# EAGLE board calculator (EAGLE 9.7.0)

Size 197.85 x 123.23 mm. Coordinates in mm from the lower left corner, seen from the top.
Outline: 0,0 197.85,0 197.85,123.23 0,123.23 0,0
Copper layers (1*16): Top 0.035mm / dielectric 1.5mm / Bottom 0.035mm
Design rules "default": minimum track width 6mil, minimum drill 0.35mm, track to track 6mil, track to pad 6mil, pad to pad 6mil, via to via 6mil, smd to smd 6mil, copper to edge 40mil, drill to drill 6mil, minimum pad ring 10mil, minimum via ring 8mil, stop-mask expansion 4mil, vias tented up to drill 0mil, thermal gap 10mil

## Footprints (pad centres in the part's own frame; a part is rotated, then mirrored left to right if it is on the bottom)
RESAD1016W63L850D250B = drill 0.83 pad 1.43: 1 -5.08,0; 2 5.08,0
SWITCH-MOMENTARY-PTH-6.5MM = drill 1.016 pad 1.88: 1 -3.251,2.261; 2 3.251,2.261; 3 -3.251,-2.261; 4 3.251,-2.261
ARDUINO-UNO-R3-SHIELD = drill 1.016 pad 1.88: 3.3V 24.13,-2.54; 5V 24.13,0; A0 24.13,12.7; A1 24.13,15.24; A2 24.13,17.78; A3 24.13,20.32; A4 24.13,22.86; A5 24.13,25.4; AREF -24.13,-13.97; D2 -24.13,20.32; D3 -24.13,17.78; D4 -24.13,15.24; D5 -24.13,12.7; D6 -24.13,10.16; D7 -24.13,7.62; D8 -24.13,3.81; D9 -24.13,1.27; D10 -24.13,-1.27; D11 -24.13,-3.81; D12 -24.13,-6.35; D13 -24.13,-8.89; GND@0 24.13,2.54; GND@1 24.13,5.08; GND@2 -24.13,-11.43; IOREF 24.13,-7.62; NC 24.13,-10.16; RES 24.13,-5.08; RX -24.13,25.4; SCL -24.13,-19.05; SDA -24.13,-16.51; TX -24.13,22.86; VIN 24.13,7.62
JHD-162A = drill 1.016 long: 1 -19.05,0; 2 -16.51,0; 3 -13.97,0; 4 -11.43,0; 5 -8.89,0; 6 -6.35,0; 7 -3.81,0; 8 -1.27,0; 9 1.27,0; 10 3.81,0; 11 6.35,0; 12 8.89,0; 13 11.43,0; 14 13.97,0; 15 16.51,0; 16 19.05,0

## Placement (x,y rotation side)
R1  220  [RESAD1016W63L850D250B]  161.27,47.07 90 top
R2  220  [RESAD1016W63L850D250B]  110.47,11.51 90 top
R3  220  [RESAD1016W63L850D250B]  64.75,21.67 0 top
R4  220  [RESAD1016W63L850D250B]  77.45,21.67 0 top
R5  220  [RESAD1016W63L850D250B]  90.15,21.67 0 top
R7  220  [RESAD1016W63L850D250B]  102.85,21.67 0 top
R8  220  [RESAD1016W63L850D250B]  113.01,11.51 90 top
R9  220  [RESAD1016W63L850D250B]  107.93,47.07 90 top
R10  220  [RESAD1016W63L850D250B]  95.23,41.99 0 top
R11  220  [RESAD1016W63L850D250B]  82.53,39.45 0 top
R12  220  [RESAD1016W63L850D250B]  69.83,41.99 0 top
R13  220  [RESAD1016W63L850D250B]  57.13,39.45 180 top
R14  220  [RESAD1016W63L850D250B]  49.51,47.07 90 top
R15  220  [RESAD1016W63L850D250B]  41.89,44.53 90 top
R16  220  [RESAD1016W63L850D250B]  34.27,8.97 90 top
R17  220  [RESAD1016W63L850D250B]  36.81,47.07 90 top
R19  220  [RESAD1016W63L850D250B]  16.49,39.45 180 top
R20  220  [RESAD1016W63L850D250B]  6.33,26.75 90 top
R24  220  [RESAD1016W63L850D250B]  26.65,24.21 180 top
R26  220  [RESAD1016W63L850D250B]  36.81,8.97 90 top
R27  220  [RESAD1016W63L850D250B]  62.21,8.97 90 top
S1  SWITCH_MOMENTARY  [SWITCH-MOMENTARY-PTH-6.5MM]  107.42,35.35 330 top
S2  SWITCH_MOMENTARY  [SWITCH-MOMENTARY-PTH-6.5MM]  94.72,35.35 330 top
S3  SWITCH_MOMENTARY  [SWITCH-MOMENTARY-PTH-6.5MM]  82.02,35.35 330 top
S4  SWITCH_MOMENTARY  [SWITCH-MOMENTARY-PTH-6.5MM]  69.32,35.35 330 top
S5  SWITCH_MOMENTARY  [SWITCH-MOMENTARY-PTH-6.5MM]  56.62,35.35 330 top
S6  SWITCH_MOMENTARY  [SWITCH-MOMENTARY-PTH-6.5MM]  105.9,19.42 30 top
S7  SWITCH_MOMENTARY  [SWITCH-MOMENTARY-PTH-6.5MM]  93.2,19.42 30 top
S8  SWITCH_MOMENTARY  [SWITCH-MOMENTARY-PTH-6.5MM]  80.5,19.42 30 top
S9  SWITCH_MOMENTARY  [SWITCH-MOMENTARY-PTH-6.5MM]  67.8,19.42 30 top
S10  SWITCH_MOMENTARY  [SWITCH-MOMENTARY-PTH-6.5MM]  55.1,19.42 30 top
S11  SWITCH_MOMENTARY  [SWITCH-MOMENTARY-PTH-6.5MM]  44.43,28.02 90 top
S12  SWITCH_MOMENTARY  [SWITCH-MOMENTARY-PTH-6.5MM]  28.68,35.35 330 top
S13  SWITCH_MOMENTARY  [SWITCH-MOMENTARY-PTH-6.5MM]  15.98,35.35 330 top
S14  SWITCH_MOMENTARY  [SWITCH-MOMENTARY-PTH-6.5MM]  27.16,19.42 30 top
S15  SWITCH_MOMENTARY  [SWITCH-MOMENTARY-PTH-6.5MM]  14.46,19.42 30 top
U1  ARDUINO-UNO-R3-SHIELD  [ARDUINO-UNO-R3-SHIELD]  79.83,93.38 270 top
U3  LCD-16X2JHD-162A  [JHD-162A]  142.22,37.04 0 top

## Library data of the parts
R1-R5 R7-R17 R19 R20 R24 R26 R27 S1-S15 U1 U3 = Tinkercad

## Nets
S1_4: R9.1 R10.2 S1.3 S1.4
S2_3: R10.1 R11.2 S2.3 S2.4
S3_3: R11.1 R12.2 S3.3 S3.4
S4_4: R12.1 R13.1 S4.3 S4.4
S6_4: R2.2 R7.2 S6.3 S6.4
S7_3: R5.2 R7.1 S7.3 S7.4
S8_4: R4.2 R5.1 S8.3 S8.4
S9_4: R3.2 R4.1 S9.3 S9.4
S10_4: R3.1 R27.2 S10.3 S10.4
S12_3: R17.1 R19.1 S12.3 S12.4
S13_4: R19.2 R20.2 S13.3 S13.4
S14_4: R24.1 R26.2 S14.3 S14.4
S15_4: R20.1 R24.2 S15.3 S15.4
U1_5V: R13.2 R15.2 R16.1 R26.1 R27.1 S5.3 S5.4 U1.5V U3.2 U3.15
U1_A0: R16.2 S12.1 S12.2 S13.1 S13.2 S14.1 S14.2 S15.1 S15.2 U1.A0
U1_A1: R15.1 S11.1 S11.2 U1.A1
U1_A2: R14.1 S1.1 S1.2 S2.1 S2.2 S3.1 S3.2 S4.1 S4.2 S5.1 S5.2 U1.A2
U1_A3: R8.2 S6.1 S6.2 S7.1 S7.2 S8.1 S8.2 S9.1 S9.2 S10.1 S10.2 U1.A3
U1_D2: U1.D2 U3.14
U1_D3: U1.D3 U3.13
U1_D4: U1.D4 U3.12
U1_D5: U1.D5 U3.11
U1_D11: U1.D11 U3.6
U1_D12: U1.D12 U3.4
U1_GND: R1.2 R2.1 R8.1 R9.2 R14.2 R17.2 S11.3 S11.4 U1.GND@0 U1.GND@1 U1.GND@2 U3.1 U3.3 U3.5
U3_LED-: R1.1 U3.16

## Tracks (layer width: path | path; a pad name or v marks a point on that pad's centre or on a via)
S1_4  (3 unrouted)
S2_3  (3 unrouted)
S3_3  (3 unrouted)
S4_4  (3 unrouted)
S6_4  (3 unrouted)
S7_3  (3 unrouted)
S8_4  (3 unrouted)
S9_4  (3 unrouted)
S10_4  (3 unrouted)
S12_3  (3 unrouted)
S13_4  (3 unrouted)
S14_4  (3 unrouted)
S15_4  (3 unrouted)
U1_5V  (9 unrouted)
U1_A0  (9 unrouted)
U1_A1  (3 unrouted)
U1_A2  (11 unrouted)
U1_A3  (11 unrouted)
U1_D2  (1 unrouted)
U1_D3  (1 unrouted)
U1_D4  (1 unrouted)
U1_D5  (1 unrouted)
U1_D11  (1 unrouted)
U1_D12  (1 unrouted)
U1_GND  (13 unrouted)
U3_LED-  (1 unrouted)